# Altium PCB CLP_007.PcbDoc (part 2 of 2)
Units mm, origin at the board's own origin, x right, y up, seen from the top; angles counter-clockwise.
Board outline 145 x 100 mm, 2 copper layers (Top Layer, Bottom Layer); 159 components, 145 nets, 656 pads, 92 vias.
Unrouted connection lines stored in the file: 86.
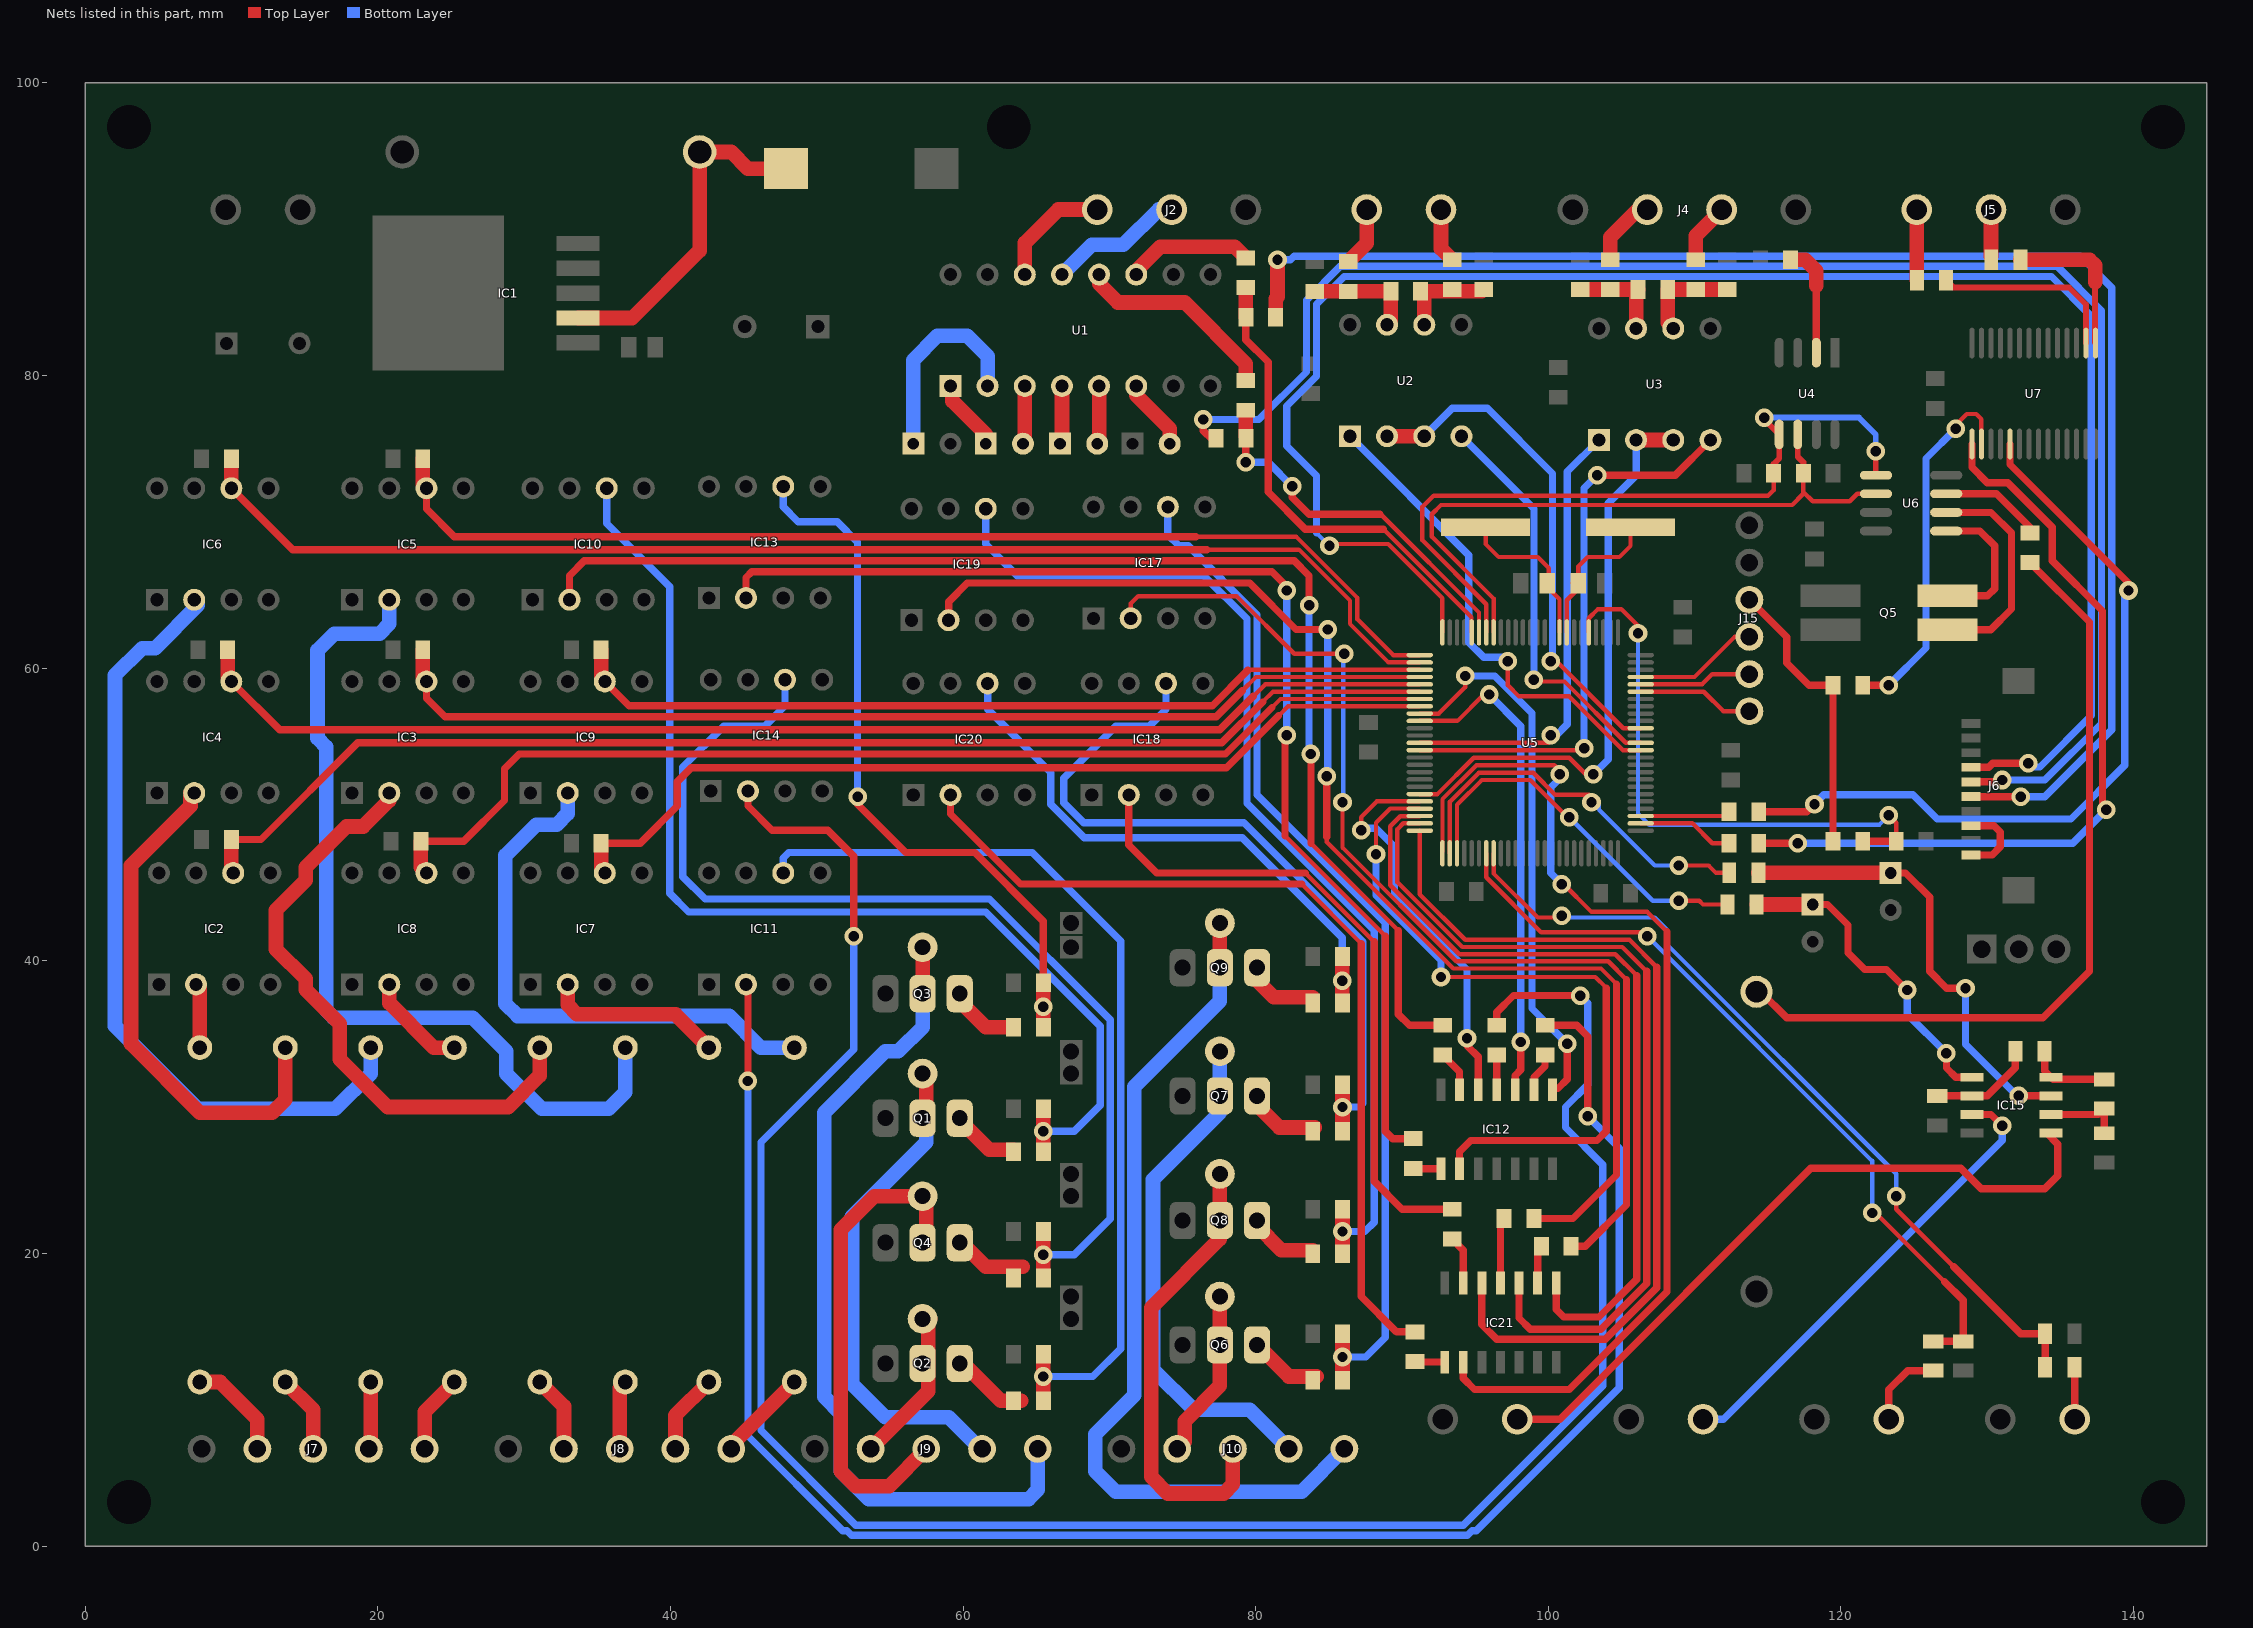
[diagram p2: the nets of this part, all layers, seen from the top]

## Via types
v1: diameter 1.27, hole 0.711, Top Layer to Bottom Layer, 92 vias

## Nets (pads, with @x,y where several pads share a name; then routed paths per layer and width w, separated by ;. In a path a pad name is that pad's centre, name@x,y a point inside that pad or via, vN(x,y) a via of type N, cw(c..) or ccw(c..) an arc to the next point about the centre after c; other vN are vias at no path point) (continued)
NetBATH1_1: BATH1.1 R53.1 | length 54.4
  Top Layer w0.5: BATH1.1@114.222,37.885 114.501,37.885 116.285,36.101 133.811,36.101 136.986,39.276 136.986,63.152 R53.1@132.922,67.216
NetC5_1: C5.1 U1.2 | length 14.1
  Bottom Layer w1: C5.1@56.595,75.344 56.595,81.059 58.246,82.71 60.278,82.71 61.675,81.313 U1.2@61.675,79.281
NetC6_1: C6.1 U1.1 | length 4.9
  Top Layer w1: U1.1@59.135,79.281 59.262,79.154 59.262,78.265 61.548,75.979 C6.1@61.548,75.344
NetC6_2: C6.2 U1.3 | length 3.8
  Top Layer w1: C6.2@64.215,75.471 U1.3@64.215,79.281
NetC7_1: C7.1 U1.4 | length 3.8
  Top Layer w1: C7.1@66.755,75.471 U1.4@66.755,79.281
NetC7_2: C7.2 U1.5 | length 3.8
  Top Layer w1: C7.2@69.295,75.471 U1.5@69.295,79.281
NetC8_2: C8.2 U1.6 | length 4.9
  Top Layer w1: U1.6@71.835,79.281 71.835,78.646 74.121,76.36 C8.2@74.121,75.344
NetC15_2: C15.2 U5.34 X1.1 | length 10.8
  Top Layer w0.3: X1.1@95.711,69.629 95.711,68.486 96.6,67.597 99.267,67.597 100.04,66.824 100.04,65.427 100.759,64.708 U5.34@100.759,62.447
NetC16_2: C16.2 U5.33 X1.2 | length 10.3
  Top Layer w0.3: U5.33@101.259,62.447 101.259,64.636 101.934,65.311 101.934,65.554 C16.2@101.669,65.819 ; C16.2@102.05,65.819 102.05,66.951 102.696,67.597 104.855,67.597 105.617,68.359 X1.2@105.617,69.629
NetC19_1: C19.1 U7.2 | length 25.4
  Top Layer w0.3: v1(127.842,76.36) 127.842,76.614 128.604,77.376 129.239,77.376 129.601,77.014 U7.2@129.601,75.323
  Top Layer w0.5: C19.1@121.492,58.834 v1(123.27,58.834)
  Bottom Layer w0.5: v1(123.27,58.834) 125.81,61.374 125.81,74.328 v1(127.842,76.36)
NetC19_2: C19.2 J15.3 R39.1 | length 19.8
  Top Layer w0.5: J15.3@113.745,64.676 116.285,62.136 116.285,60.358 117.809,58.834 C19.2@119.46,58.834 R39.1@119.46,48.166
NetC20_1: C20.1 IC15.3 R58.2 | length 31.5
  Top Layer w0.5: C20.1@123.397,46.007 124.413,46.007 126.064,44.356 126.064,39.276 127.207,38.133 v1(128.51,38.133) ; v1(132.16,30.767) IC15.3@134.352,30.767
  Top Layer w1: R58.2@114.364,46.007 C20.1@123.397,46.007
  Bottom Layer w0.5: v1(128.51,38.133) 128.51,34.29 v1@132.096,30.703
NetC21_1: C21.1 IC15.5 R61.2 | length 22.3
  Top Layer w0.5: C21.1@118.063,43.848 119.079,43.848 120.476,42.451 120.476,40.546 121.619,39.403 123.11,39.403 124.507,38.006 v1(124.54,38.006) ; v1(127.207,33.688) 127.207,32.672 127.842,32.037 IC15.5@128.952,32.037
  Top Layer w1: R61.2@114.237,43.848 C21.1@118.063,43.848
  Bottom Layer w0.5: v1(124.54,38.006) 124.54,36.355 v1(127.207,33.688)
NetD1_1: D1.1 IC1.2 L1.1 | length 23.3
  Top Layer w1: IC1.2@33.685,83.931 37.369,83.931 41.99,88.552 D1.1@41.99,95.283 44.149,95.283 45.292,94.14 L1.1@47.889,94.14
NetD2_2: D2.2 J9.4 Q1.2 | length 34.2
  Top Layer w1: Q1.2@57.484,28.862 D2.2@57.484,32.291
  Bottom Layer w1: Q1.2@57.484,28.862 57.484,27.592 52.404,22.512 52.404,11.082 54.69,8.796 59.008,8.796 61.294,6.51 J9.4@61.294,6.637
NetD3_2: D3.2 J9.2 Q2.2 | length 10.6
  Top Layer w1: J9.2@53.674,6.637 57.611,10.574 57.611,12.352 57.611,15.4 D3.2@57.738,15.527
NetD4_2: D4.2 J9.5 Q3.2 | length 56.5
  Top Layer w1: Q3.2@57.23,37.244 D4.2@57.23,40.546
  Bottom Layer w1: Q3.2@57.23,37.244 57.23,35.466 55.579,33.815 54.69,33.815 50.499,29.624 50.499,10.193 51.642,9.05 51.642,5.113 53.547,3.208 64.469,3.208 65.104,3.843 J9.5@65.104,6.637
NetD5_2: D5.2 J9.3 Q4.2 | length 33.9
  Top Layer w1: J9.3@57.484,6.637 54.944,4.097 52.658,4.097 51.642,5.113 51.642,21.623 53.928,23.909 57.484,23.909 Q4.2@57.484,20.607
NetD6_2: D6.2 J10.2 Q6.2 | length 11.8
  Top Layer w1: J10.2@74.629,6.637 75.137,7.145 75.137,8.542 77.55,10.955 Q6.2@77.55,13.876 ; Q6.2@77.55,13.749 D6.2@77.55,17.051
NetD7_2: D7.2 J10.4 Q7.2 | length 35.4
  Bottom Layer w1: D7.2@78.058,33.815 77.55,33.307 Q7.2@77.55,30.767 77.55,29.624 72.978,25.052 72.978,12.098 75.772,9.304 79.582,9.304 J10.4@82.249,6.637
NetD8_2: D8.2 J10.3 Q8.2 | length 29.5
  Top Layer w1: Q8.2@77.55,20.988 72.851,16.289 72.851,9.939 72.851,4.732 73.994,3.589 77.804,3.589 78.439,4.224 J10.3@78.439,6.637 ; Q8.2@77.55,22.258 D8.2@77.55,24.798
NetD9_2: D9.2 J10.5 Q9.2 | length 58.8
  Top Layer w1: Q9.2@77.55,39.53 D9.2@77.55,41.562
  Bottom Layer w1: Q9.2@77.55,39.53 77.55,37.244 71.708,31.402 71.708,10.32 69.041,7.653 69.041,5.113 70.438,3.716 83.138,3.716 J10.5@86.059,6.637
NetIC2_2: IC2.2 R23.2 | length 4.2
  Top Layer w1: R23.2@7.827,34.069 IC2.2@7.827,38.26
NetIC2_6: IC2.6 R21.2 U5.56 | length 87.8
  Top Layer w0.3: 80.471,57.691 81.177,58.397 U5.56@91.209,58.397
  Top Layer w0.5: R21.2@9.986,48.293 12.018,48.293 18.622,54.897 77.677,54.897 80.471,57.691
  Top Layer w1: R21.2@9.986,48.293 9.986,46.261 IC2.6@10.24,46.007
NetIC3_2: IC3.2 R24.2 | length 41.7
  Top Layer w1: IC3.2@20.781,51.468 20.781,50.96 19.003,49.182 17.86,49.182 15.066,46.388 15.066,45.499 13.034,43.467 13.034,40.8 15.066,38.768 15.066,38.02 17.399,35.687 17.399,33.274 20.668,30.005 28.909,30.005 31.068,32.164 R24.2@31.068,34.069
NetIC3_6: IC3.6 R22.2 U5.54 | length 72.6
  Top Layer w0.3: 79.074,58.453 80.018,59.397 U5.54@91.209,59.397
  Top Layer w0.5: IC3.6@23.321,59.088 23.321,57.945 24.591,56.675 77.296,56.675 79.074,58.453
  Top Layer w1: IC3.6@23.067,59.342 R22.2@23.067,61.247
NetIC4_2: IC4.2 R27.2 | length 35.2
  Top Layer w1: IC4.2@7.192,51.468 7.192,50.579 3.128,46.515 3.128,34.323 7.827,29.624 12.78,29.624 13.669,30.513 R27.2@13.669,34.069
NetIC4_6: IC4.6 R25.2 U5.55 | length 86.1
  Top Layer w0.3: 79.836,58.072 80.661,58.897 U5.55@91.209,58.897
  Top Layer w0.5: IC4.6@9.986,59.088 13.288,55.786 77.55,55.786 79.836,58.072
  Top Layer w1: R25.2@9.732,61.247 9.732,59.342 IC4.6@9.986,59.088
NetIC5_2: IC5.2 R28.2 | length 59.8
  Bottom Layer w1: IC5.2@20.781,64.676 20.781,63.025 20.113,62.357 17.018,62.357 15.875,61.214 15.875,55.199 16.463,54.611 16.463,36.609 16.971,36.101 26.496,36.101 28.782,33.815 28.782,32.291 31.195,29.878 35.767,29.878 36.91,31.021 R28.2@36.91,34.069
NetIC5_6: IC5.6 R26.2 U5.51 | length 76.4
  Top Layer w0.3: 75.899,68.994 82.757,68.994 86.948,64.803 86.948,63.341 89.392,60.897 U5.51@91.209,60.897
  Top Layer w0.5: IC5.6@23.321,72.296 23.321,70.899 25.226,68.994 75.899,68.994
  Top Layer w1: R26.2@23.067,74.328 23.067,72.55 IC5.6@23.321,72.296
NetIC6_2: IC6.2 R31.2 | length 54.6
  Bottom Layer w1: IC6.2@7.7,64.676 7.7,64.295 4.779,61.374 3.89,61.374 2.032,59.516 2.032,35.546 7.7,29.878 17.098,29.878 19.511,32.291 R31.2@19.511,34.069
NetIC6_6: IC6.6 R29.2 U5.52 | length 88.9
  Top Layer w0.3: 76.661,68.105 82.953,68.105 86.44,64.618 86.44,63.025 89.068,60.397 U5.52@91.209,60.397
  Top Layer w0.5: IC6.6@9.986,72.296 14.177,68.105 76.661,68.105
  Top Layer w1: IC6.6@9.986,72.55 R29.2@9.986,74.328
NetIC7_2: IC7.2 R32.2 | length 12.3
  Top Layer w1: IC7.2@32.973,38.387 32.973,36.99 33.608,36.355 40.339,36.355 R32.2@42.625,34.069
NetIC7_6: IC7.6 R30.2 U5.58 | length 62.9
  Top Layer w0.3: 81.55,56.738 82.209,57.397 U5.58@91.209,57.397
  Top Layer w0.5: R30.2@35.259,48.039 37.926,48.039 40.466,50.579 40.466,52.23 41.427,53.191 78.003,53.191 81.55,56.738
  Top Layer w1: R30.2@35.259,48.039 35.259,46.261 IC7.6@35.513,46.007
NetIC8_2: IC8.2 R35.2 | length 7
  Top Layer w1: IC8.2@20.781,38.387 20.781,37.117 23.829,34.069 R35.2@25.226,34.069
NetIC8_6: IC8.6 R33.2 U5.57 | length 75.9
  Top Layer w0.3: 81.106,57.31 81.693,57.897 U5.57@91.209,57.897
  Top Layer w0.5: R33.2@22.94,48.166 25.861,48.166 28.655,50.96 28.655,53.119 29.671,54.135 77.931,54.135 81.106,57.31
  Top Layer w1: R33.2@22.94,48.166 22.94,46.388 IC8.6@23.321,46.007
NetIC9_2: IC9.2 R36.2 | length 38
  Bottom Layer w1: IC9.2@32.973,51.468 32.973,50.071 32.211,49.309 30.814,49.309 28.702,47.197 28.702,37.07 29.544,36.228 44.022,36.228 46.181,34.069 R36.2@48.467,34.069
NetIC9_6: IC9.6 R34.2 U5.53 | length 59.7
  Top Layer w0.3: 79.455,59.85 79.502,59.897 U5.53@91.209,59.897
  Top Layer w0.5: IC9.6@35.513,59.088 37.164,57.437 77.042,57.437 79.455,59.85
  Top Layer w1: R34.2@35.259,61.247 35.259,59.342 IC9.6@35.513,59.088
NetIC10_2: IC10.2 R43.2 | length 89
  Top Layer w0.3: 83.773,48.039 89.742,42.07
  Top Layer w0.5: IC10.2@33.1,64.676 33.1,66.327 34.116,67.343 82.63,67.343 83.646,66.327 v1@83.646,64.168 ; 83.773,48.039 v1(83.773,54.135) ; 89.742,42.07 89.742,36.355 90.504,35.593 R43.2@92.79,35.593
  Bottom Layer w0.5: v1@83.646,54.135 v1(83.646,64.295)
NetIC10_6: IC10.6 R41.2 R45.1 | length 74.9
  Top Layer w1: R45.1@65.485,27.211 v1(65.485,28.354) R41.2@65.485,29.497
  Bottom Layer w0.5: IC10.6@35.64,72.296 35.64,69.883 39.958,65.565 39.958,44.61 41.228,43.34 61.548,43.34 69.367,35.521 69.367,30.132 67.589,28.354 v1(65.485,28.354)
NetIC11_2: IC11.2 R44.2 | length 125.3
  Top Layer w0.5: IC11.2@45.165,38.387 45.292,38.26 v1(45.292,31.783) ; R44.2@100.029,35.593 101.934,35.593 102.696,34.831 v1(102.696,29.37)
  Bottom Layer w0.5: v1(45.292,31.783) 45.292,7.526 51.769,1.049 52.063,1.049 52.372,0.74 94.473,0.74 94.782,1.049 95.076,1.049 104.855,10.828 104.855,27.211 v1(102.696,29.37)
NetIC11_6: IC11.6 R42.2 R46.1 | length 63.3
  Top Layer w1: R46.1@65.485,10.193 v1(65.485,11.59) R42.2@65.485,12.86
  Bottom Layer w0.5: IC11.6@47.705,46.007 47.705,47.023 48.086,47.404 64.723,47.404 70.768,41.359 70.768,13.495 68.863,11.59 v1(65.485,11.59)
NetIC12_1: IC12.1 U5.59 | length 37.6
  Top Layer w0.3: U5.59@91.209,56.897 92.504,56.897 94.314,58.707 v1(94.314,59.469)
  Top Layer w0.5: IC12.1@100.283,31.181 100.377,31.275 100.664,31.275 101.299,31.91 v1(101.299,34.323)
  Bottom Layer w0.5: v1(94.314,59.469) 96.346,59.469 98.886,56.929 98.886,36.736 v1(101.299,34.323)
NetIC12_2: IC12.2 R44.1 | length 2.7
  Top Layer w0.5: IC12.2@99.013,31.181 99.013,32.037 99.775,32.799 R44.1@99.775,33.561
NetIC12_3: IC12.3 U5.60 | length 33.6
  Top Layer w0.3: U5.60@91.209,56.397 93.782,56.397 95.584,58.199 v1(95.965,58.199)
  Top Layer w0.5: IC12.3@97.743,31.181 97.743,32.164 98.124,32.545 v1(98.124,34.45)
  Bottom Layer w0.5: v1(95.965,58.199) 98.124,56.04 v1(98.124,34.45)
NetIC12_4: IC12.4 R50.1 | length 2.5
  Top Layer w0.5: R50.1@96.219,33.561 96.473,33.307 IC12.4@96.473,31.181
NetIC12_5: IC12.5 U5.71 | length 27.4
  Top Layer w0.3: v1(87.202,48.928) 87.202,49.817 88.282,50.897 U5.71@91.209,50.897
  Top Layer w0.5: v1(94.441,34.704) 94.441,34.196 95.203,33.434 IC12.5@95.203,31.181
  Bottom Layer w0.5: v1(87.202,48.928) 87.075,49.055 88.218,49.055 89.488,47.785 89.488,44.356 94.441,39.403 v1(94.441,34.704)
NetIC12_6: IC12.6 R43.1 | length 2.9
  Top Layer w0.5: R43.1@92.79,33.561 93.933,32.418 IC12.6@93.933,31.181
NetIC12_8: IC12.8 R49.1 | length 1.9
  Top Layer w0.5: R49.1@90.758,25.814 90.791,25.781 IC12.8@92.663,25.781
NetIC12_9: IC12.9 U5.72 | length 49
  Top Layer w0.3: v1(88.218,47.277) 88.218,49.436 89.189,50.407 U5.72@91.199,50.407 ; v1(92.663,38.895) 103.204,38.895 103.966,38.133
  Top Layer w0.5: IC12.9@93.933,25.781 93.933,26.957 94.695,27.719 103.331,27.719 103.966,28.354 103.966,38.133
  Bottom Layer w0.5: v1(88.218,47.277) 88.218,44.483 92.663,40.038 v1(92.663,38.895)
NetIC13_2: IC13.2 R49.2 | length 81.1
  Top Layer w0.3: 81.995,48.547 88.853,41.689
  Top Layer w0.5: IC13.2@45.165,64.803 45.165,66.2 45.546,66.581 81.106,66.581 81.995,65.692 81.995,65.438 v1(82.122,65.311) ; 81.995,48.547 v1@81.995,55.405 ; 88.853,41.689 88.853,28.354 89.361,27.846 R49.2@90.758,27.846
  Bottom Layer w0.5: v1(82.122,55.405) v1(82.122,65.311)
NetIC13_6: IC13.6 R47.2 R51.1 | length 48
  Top Layer w0.5: v1(52.785,51.214) 52.785,50.706 56.087,47.404 60.786,47.404 65.485,42.705 R47.2@65.485,38.514
  Top Layer w1: R51.1@65.485,35.466 v1(65.485,36.863) R47.2@65.485,37.879
  Bottom Layer w0.5: IC13.6@47.705,72.423 47.705,71.026 48.721,70.01 51.388,70.01 52.785,68.613 v1(52.785,51.214)
NetIC14_2: IC14.2 R50.2 | length 151.9
  Top Layer w0.5: IC14.2@45.292,51.595 45.292,50.579 46.943,48.928 50.753,48.928 52.531,47.15 v1(52.531,41.689) ; R50.2@96.473,35.593 96.473,36.482 97.616,37.625 v1(102.188,37.625)
  Bottom Layer w0.5: IC14.2@45.292,51.087 IC14.2@45.292,51.595 ; v1(52.531,41.689) 52.531,33.942 46.181,27.592 46.181,7.907 52.658,1.43 94.187,1.43 103.712,10.955 103.712,26.068 101.172,28.608 101.172,30.005 102.696,31.529 102.696,37.117 v1(102.188,37.625)
NetIC14_6: IC14.6 R48.2 R52.1 | length 73.6
  Top Layer w1: R52.1@65.485,18.321 v1(65.485,19.908) R48.2@65.485,21.496
  Bottom Layer w0.5: IC14.6@47.832,59.215 47.832,57.437 46.435,56.04 43.641,56.04 40.847,53.246 40.847,45.753 42.371,44.229 61.802,44.229 70.057,35.974 70.057,22.364 67.602,19.908 v1(65.485,19.908)
NetIC15_1: IC15.1 J11.2 | length 48.2
  Top Layer w0.5: J11.2@97.87,8.669 100.791,8.669 117.936,25.814 128.191,25.814 129.588,24.417 133.938,24.417 134.827,25.306 134.827,27.465 IC15.1@134.065,28.227
NetIC15_2: IC15.2 R59.1 R60.2 | length 5.5
  Top Layer w0.5: IC15.2@134.352,29.497 137.605,29.497 R59.1@138.002,29.894 R60.2@138.002,28.211
NetIC15_4: IC15.4 R59.2 R64.2 | length 5.7
  Top Layer w0.5: R64.2@133.922,33.815 133.922,32.467 IC15.4@134.352,32.037 134.495,31.894 R59.2@138.002,31.894
NetIC15_6: IC15.6 R64.1 R65.2 | length 7.3
  Top Layer w0.5: R65.2@126.572,30.751 126.588,30.767 IC15.6@128.952,30.767 130.001,30.767 131.922,32.688 R64.1@131.922,33.815
NetIC15_7: IC15.7 J12.2 | length 31.7
  Top Layer w0.5: IC15.7@128.952,29.497 130.255,29.497 v1(131.017,28.735)
  Bottom Layer w0.5: J12.2@110.57,8.669 111.967,8.669 131.017,27.719 v1(131.017,28.735)
NetIC17_2: IC17.2 R70.2 | length 74.3
  Top Layer w0.3: IC17.2@71.454,63.406 71.454,64.422 71.962,64.93 78.693,64.93 82.63,60.993 v1(86.059,60.993) ; v1(85.932,50.833) 85.932,47.738 93.705,39.965 104.086,39.965 105.346,38.705
  Top Layer w0.5: R70.2@101.553,20.48 102.514,20.48 105.346,23.312 105.346,38.705
  Bottom Layer w0.3: v1(85.932,50.833) 85.991,50.892 85.991,60.925 v1(86.059,60.993)
NetIC17_6: IC17.6 R68.2 R72.1 | length 69.4
  Top Layer w1: R72.1@85.932,11.59 v1(85.932,12.923) R68.2@85.932,14.257
  Bottom Layer w0.5: IC17.6@73.994,71.026 73.994,69.121 74.756,68.359 75.391,68.359 80.09,63.66 80.09,51.341 88.853,42.578 88.853,14.257 87.519,12.923 v1(85.932,12.923)
NetIC18_2: IC18.2 R71.2 | length 45.4
  Top Layer w0.3: 83.392,46.007 88.091,41.308
  Top Layer w0.5: IC18.2@71.327,51.341 71.327,47.912 73.232,46.007 83.392,46.007 ; 88.091,41.308 88.091,24.925 89.996,23.02 R71.2@93.425,23.02
NetIC18_6: IC18.6 R69.2 R73.1 | length 51.6
  Top Layer w1: R73.1@85.932,28.608 v1(85.932,30.005) R69.2@85.932,30.894
  Bottom Layer w0.5: IC18.6@73.867,58.961 73.867,57.183 72.724,56.04 70.438,56.04 66.882,52.484 66.882,50.793 68.239,49.436 79.201,49.436 87.329,41.308 87.329,30.259 87.075,30.005 v1(85.932,30.005)
NetIC19_2: IC19.2 R76.2 | length 87.3
  Top Layer w0.3: 84.857,48.479 84.857,48.12 93.502,39.475 103.6,39.475 104.656,38.419
  Top Layer w0.5: IC19.2@59.008,63.279 59.008,64.549 60.278,65.819 79.582,65.819 82.757,62.644 v1(84.916,62.644) ; 84.857,48.479 v1(84.857,52.611) ; R76.2@99.013,22.385 101.68,22.385 104.656,25.361 104.656,38.419
  Bottom Layer w0.5: v1(84.857,52.611) 84.916,52.67 v1(84.916,62.644)
NetIC19_6: IC19.6 R74.2 R78.1 | length 72.2
  Top Layer w1: R78.1@85.932,20.226 v1(85.932,21.496) R74.2@85.932,22.766
  Bottom Layer w0.5: IC19.6@61.548,70.899 61.548,68.486 63.707,66.327 76.447,66.327 79.4,63.374 79.4,50.761 88.091,42.07 88.091,22.131 87.456,21.496 v1(85.932,21.496)
NetIC20_2: IC20.2 R77.2 | length 61.9
  Top Layer w0.3: 83.138,45.245 87.202,41.181
  Top Layer w0.5: IC20.2@59.135,51.341 59.135,50.031 63.921,45.245 83.138,45.245 ; 87.202,41.181 87.202,17.051 89.615,14.638 R77.2@90.885,14.638
NetIC20_6: IC20.6 R75.2 R79.1 | length 39.2
  Top Layer w1: R79.1@85.923,37.498 v1(85.923,38.641) R75.2@85.923,40.038
  Bottom Layer w0.5: IC20.6@61.675,58.961 61.675,57.183 65.993,52.865 65.993,50.706 68.279,48.42 79.074,48.42 85.923,41.571 v1(85.923,38.641)
NetIC21_1: IC21.1 U5.73 | length 55.1
  Top Layer w0.3: U5.73@91.209,49.897 91.199,49.887 89.881,49.887 89.193,49.199 89.193,45.17 93.908,40.455 104.571,40.455 106.036,38.99
  Top Layer w0.5: IC21.1@100.537,17.973 100.537,16.162 101.045,15.654 103.458,15.654 106.036,18.232 106.036,38.99
NetIC21_2: IC21.2 R70.1 | length 2.5
  Top Layer w0.5: IC21.2@99.267,17.973 99.267,19.972 R70.1@99.648,20.353
NetIC21_3: IC21.3 U5.74 | length 58.9
  Top Layer w0.3: U5.74@91.209,49.397 90.084,49.397 89.683,48.996 89.683,45.373 94.111,40.945 105.057,40.945 106.726,39.276
  Top Layer w0.5: IC21.3@97.997,17.973 97.997,15.582 98.759,14.82 103.6,14.82 106.726,17.946 106.726,39.276
NetIC21_4: IC21.4 R76.1 | length 4.4
  Top Layer w0.5: IC21.4@96.727,17.973 R76.1@96.727,22.385
NetIC21_5: IC21.5 U5.75 | length 61.2
  Top Layer w0.3: U5.75@91.209,48.897 91.199,48.907 91.199,44.55 94.314,41.435 105.543,41.435 107.416,39.562
  Top Layer w0.5: IC21.5@95.457,17.973 95.457,15.146 96.473,14.13 103.886,14.13 107.416,17.66 107.416,39.562
NetIC21_6: IC21.6 R71.1 | length 3.3
  Top Layer w0.5: R71.1@93.425,20.988 94.187,20.226 IC21.6@94.187,17.973
NetIC21_8: IC21.8 R77.1 | length 2
  Top Layer w0.5: R77.1@90.918,12.573 IC21.8@92.917,12.573
NetIC21_9: IC21.9 U5.76 | length 72.9
  Top Layer w0.3: U5.76@92.769,47.447 92.769,51.055 95.087,53.373 100.41,53.373 v1@101.108,52.674 ; v1@100.981,45.308 102.95,43.34 106.76,43.34 108.106,41.994
  Top Layer w0.5: IC21.9@94.187,12.573 94.187,11.463 94.949,10.701 101.432,10.701 108.106,17.375 108.106,41.994
  Bottom Layer w0.5: v1(100.791,52.738) 101.045,52.738 100.156,51.849 100.156,46.007 v1(100.918,45.245)
NetJ2_2: J2.2 U1.13 | length 9.3
  Bottom Layer w1: U1.13@66.755,86.901 68.787,88.933 70.946,88.933 73.359,91.346 J2.2@74.248,91.346
NetJ2_3: J2.3 U1.14 | length 8.1
  Top Layer w1: U1.14@64.215,86.901 64.215,89.06 66.501,91.346 J2.3@69.168,91.346
NetJ3_1: J3.1 R2.2 | length 3.7
  Top Layer w1: J3.1@92.663,91.346 92.663,88.679 R2.2@93.425,87.917
NetJ3_2: J3.2 R4.2 | length 4.1
  Top Layer w1: R4.2@86.313,87.79 87.583,89.06 J3.2@87.583,91.346
NetJ4_2: J4.2 R9.2 | length 4.2
  Top Layer w1: R9.2@110.062,87.917 110.062,89.568 J4.2@111.84,91.346
NetJ4_3: J4.3 R12.2 | length 4.9
  Top Layer w1: R12.2@104.22,87.917 104.22,89.441 106.125,91.346 J4.3@106.76,91.346
NetJ5_2: J5.2 R57.1 | length 3.2
  Top Layer w1: R57.1@130.255,88.155 J5.2@130.255,91.346
NetJ5_3: J5.3 R55.1 | length 4.8
  Top Layer w1: R55.1@125.175,86.52 J5.3@125.175,91.346
NetJ6_1: J6.1 J6.3 | length 5.4
  Top Layer w0.5: J6.1@128.884,47.226 130.331,47.226 130.89,47.785 130.89,48.801 130.465,49.226 J6.3@128.884,49.226
NetJ6_5: J6.5 R8.2 | length 103.7
  Top Layer w0.5: J6.5@128.884,51.226 128.896,51.214 v1(132.287,51.214)
  Top Layer w1: R8.2@81.36,83.98 81.36,85.25 81.487,85.377 v1(81.487,87.917)
  Bottom Layer w0.5: v1(81.487,87.917) 82.376,87.917 82.613,88.154 136.368,88.154 138.51,86.012 138.51,55.786 133.938,51.214 v1(132.287,51.214)
NetJ6_6: J6.6 R13.2 | length 110.3
  Top Layer w0.5: v1(76.407,76.995) 76.407,76.233 R13.2@77.042,75.598 ; J6.6@128.884,52.226 128.888,52.23 130.509,52.23 130.636,52.357 v1(131.017,52.357)
  Bottom Layer w0.5: v1(76.407,76.995) 80.217,76.995 83.464,80.242 83.464,85.155 85.773,87.464 134.772,87.464 137.803,84.433 137.803,56.222 133.938,52.357 v1(131.017,52.357)
NetJ6_7: J6.7 U5.50 | length 122.5
  Top Layer w0.3: v1(85.043,68.359) 85.043,68.486 89.049,68.486 92.759,64.776 U5.50@92.759,62.447
  Top Layer w0.5: J6.7@128.884,53.226 130.108,53.226 130.382,53.5 v1(132.795,53.5)
  Bottom Layer w0.3: 84.154,69.248 v1(85.043,68.359)
  Bottom Layer w0.5: 84.154,69.248 84.154,73.153 82.122,75.185 82.122,77.924 84.154,79.956 84.154,84.869 86.059,86.774 134.391,86.774 137.113,84.052 137.113,56.762 133.597,53.246 132.795,53.246 v1(132.795,53.5)
NetJ7_2: J7.2 R23.1 | length 7
  Top Layer w1: R23.1@7.827,11.209 9.224,11.209 11.764,8.669 J7.2@11.764,6.637
NetJ7_3: J7.3 R27.1 | length 5.4
  Top Layer w1: R27.1@13.669,11.209 15.574,9.304 J7.3@15.574,6.637
NetJ7_4: J7.4 R31.1 | length 4.6
  Top Layer w1: J7.4@19.384,6.637 19.511,6.764 R31.1@19.511,11.209
NetJ7_5: J7.5 R35.1 | length 5.4
  Top Layer w1: J7.5@23.194,6.637 23.194,9.177 R35.1@25.226,11.209
NetJ8_2: J8.2 R24.1 | length 5.3
  Top Layer w1: R24.1@31.068,11.209 32.719,9.558 J8.2@32.719,6.637
NetJ8_3: J8.3 R28.1 | length 4.7
  Top Layer w1: J8.3@36.529,6.637 36.529,10.828 R28.1@36.91,11.209
NetJ8_4: J8.4 R32.1 | length 5.5
  Top Layer w1: J8.4@40.339,6.637 40.339,8.923 R32.1@42.625,11.209
NetJ8_5: J8.5 R36.1 | length 6.4
  Top Layer w1: J8.5@44.149,6.637 44.149,6.891 R36.1@48.467,11.209
NetJ13_2: J13.2 R62.2 | length 5.6
  Top Layer w0.5: J13.2@123.27,8.669 123.27,10.701 124.556,11.987 R62.2@126.318,11.987
NetJ14_2: J14.2 R63.2 | length 3.7
  Top Layer w0.5: J14.2@135.97,8.669 R63.2@135.97,12.368
NetJ15_4: J15.4 U5.22 | length 8.6
  Top Layer w0.3: U5.22@106.309,59.397 109.99,59.397 112.729,62.136 J15.4@113.745,62.136
NetJ15_5: J15.5 U5.21 | length 7.7
  Top Layer w0.3: U5.21@106.309,58.897 110.506,58.897 111.205,59.596 J15.5@113.745,59.596
NetJ15_6: J15.6 U5.20 | length 8
  Top Layer w0.3: U5.20@106.309,58.397 110.626,58.397 111.967,57.056 J15.6@113.745,57.056
NetQ1_1: Q1.1 R45.2 | length 4.2
  Top Layer w1: Q1.1@60.024,28.862 61.802,27.084 R45.2@63.453,27.084
NetQ2_1: Q2.1 R46.2 | length 4.8
  Top Layer w1: Q2.1@60.151,12.352 62.564,9.939 63.961,9.939
NetQ3_1: Q3.1 R51.2 | length 4.4
  Top Layer w1: Q3.1@59.77,37.244 61.548,35.466 R51.2@63.453,35.466
NetQ4_1: Q4.1 R52.2 | length 4.5
  Top Layer w1: Q4.1@60.151,20.48 61.548,19.083 64.088,19.083
NetQ5_1: Q5.1 U6.1 | length 10.1
  Top Layer w0.5: U6.1@127.194,69.375 129.493,69.375 130.509,68.359 130.509,65.438 130.018,64.947 Q5.1@127.27,64.947
NetQ5_4: Q5.4 U6.2 | length 15.2
  Top Layer w0.5: U6.2@127.194,70.645 130.255,70.645 131.652,69.248 131.652,64.041 130.238,62.627 Q5.4@127.27,62.627
NetQ6_1: Q6.1 R72.2 | length 5
  Top Layer w1: Q6.1@80.09,13.749 82.249,11.59 R72.2@84.154,11.59
NetQ7_1: Q7.1 R73.2 | length 5.2
  Top Layer w1: Q7.1@80.09,30.767 80.09,30.132 81.614,28.608 R73.2@84.027,28.608
NetQ8_1: Q8.1 R78.2 | length 4.9
  Top Layer w1: Q8.1@80.09,22.258 80.09,21.877 81.741,20.226 R78.2@83.9,20.226
NetQ9_1: Q9.1 R79.2 | length 5.2
  Top Layer w1: Q9.1@80.09,39.53 80.09,38.641 81.233,37.498 R79.2@83.9,37.498
NetR1_2: R1.2 R2.1 R3.1 U2.6 | length 6.2
  Top Layer w1: R3.1@91.266,85.758 R1.2@95.457,85.758 ; U2.6@91.52,83.472 R3.1@91.52,85.504
NetR3_2: R3.2 R4.1 R5.1 U2.7 | length 7.2
  Top Layer w1: R5.1@84.027,85.758 R4.1@86.313,85.758 R3.2@89.234,85.758 U2.7@89.234,83.726
NetR6_1: R6.1 R8.1 U5.46 | length 33.1
  Top Layer w0.3: 88.726,69.502 94.749,63.479 94.749,62.457 U5.46@94.759,62.447
  Top Layer w0.5: R8.1@79.328,83.98 79.328,82.456 80.852,80.932 80.852,72.042 83.392,69.502 88.726,69.502
  Top Layer w1: R8.1@79.328,83.98 R6.1@79.328,86.012
NetR6_2: R6.2 U1.11 | length 8.7
  Top Layer w1: U1.11@71.835,86.901 71.835,87.155 73.486,88.806 78.566,88.806 R6.2@79.328,88.044
NetR7_2: R7.2 R9.1 R11.1 U3.6 | length 6.3
  Top Layer w1: U3.6@108.157,83.599 R11.1@108.157,85.885 R9.1@110.062,85.885 R7.2@112.221,85.885
NetR10_1: R10.1 R13.1 U5.45 | length 25.5
  Top Layer w0.3: 88.472,70.518 88.544,70.518 95.259,63.803 U5.45@95.259,62.447
  Top Layer w0.5: v1(79.328,74.074) R13.1@79.328,75.725 R13.1@79.328,75.852 ; v1(82.503,72.423) 82.503,71.661 83.646,70.518 88.472,70.518
  Top Layer w1: R13.1@79.328,75.852 R10.1@79.328,77.63
  Bottom Layer w0.5: v1(79.328,74.074) 80.852,74.074 v1(82.503,72.423)
NetR10_2: R10.2 U1.12 | length 14.1
  Top Layer w1: U1.12@69.295,86.901 69.295,86.266 70.565,84.996 75.137,84.996 79.328,80.805 R10.2@79.328,79.662
NetR11_2: R11.2 R12.1 R14.1 U3.7 | length 6.7
  Top Layer w1: R14.1@102.188,85.885 R12.1@104.22,85.885 R11.2@106.125,85.885 105.998,85.758 U3.7@105.998,83.218
NetR19_1: R19.1 U4.2 | length 7.7
  Top Layer w0.5: U4.2@118.317,81.567 118.317,86.139
  Top Layer w1: R19.1@116.539,87.917 117.555,87.917 118.317,87.155 118.317,86.139
NetR37_2: R37.2 U4.6 U5.43 U6.6 | length 45.5
  Top Layer w0.3: U5.43@96.259,62.447 96.259,64.763 92.028,68.994 92.028,70.518 92.663,71.153 116.666,71.153 117.428,71.915 117.428,72.042 ; R37.2@117.428,73.312 117.428,72.042 ; U6.6@122.394,71.915 121.111,71.915 120.603,71.407 118.063,71.407 117.428,72.042
  Top Layer w0.4: U4.6@117.047,75.979 117.047,74.455 117.428,74.074 R37.2@117.428,73.312
NetR38_2: R38.2 U4.5 U5.44 U6.5 | length 51.6
  Top Layer w0.3: U5.44@95.759,62.447 95.759,64.374 91.393,68.74 91.393,71.026 92.155,71.788 115.015,71.788 115.396,72.169 R38.2@115.396,73.312
  Top Layer w0.4: v1(114.761,77.122) 114.634,77.249 114.634,77.122 U4.5@115.777,75.979 115.777,74.328 115.396,73.947 R38.2@115.396,73.312 ; v1(122.381,74.836) 122.381,73.198 U6.5@122.394,73.185
  Bottom Layer w0.4: v1(114.761,77.122) 121.238,77.122 122.381,75.979 v1(122.381,74.836)
NetR39_2: R39.2 R40.2 U5.30 | length 40.1
  Top Layer w0.3: U5.30@102.759,62.447 102.759,63.411 103.389,64.041 104.982,64.041 106.379,62.644 v1(106.125,62.39) ; v1(123.27,49.944) 123.778,49.436 R40.2@123.778,48.166
  Top Layer w0.5: R39.2@121.492,48.166 R40.2@123.778,48.166
  Bottom Layer w0.3: v1(106.125,62.39) 106.125,50.071 106.887,49.309 122.635,49.309 v1(123.27,49.944)
NetR53_2: R53.2 U6.3 | length 7.1
  Top Layer w0.5: U6.3@127.194,71.915 130.636,71.915 132.922,69.629 R53.2@132.922,69.248
NetR54_1: R54.1 U7.1 | length 54.5
  Top Layer w0.5: R54.1@114.38,48.039 v1(117.047,48.039) ; U7.1@128.951,75.323 128.951,73.727 130.001,72.677 131.398,72.677 134.446,69.629 134.446,67.343 137.875,63.914 137.875,50.325 v1(138.129,50.325)
  Bottom Layer w0.5: v1(117.047,48.039) 135.843,48.039 v1(138.129,50.325)
NetR54_2: R54.2 U5.2 | length 6.6
  Top Layer w0.3: U5.2@106.309,49.397 109.847,49.397 111.205,48.039 R54.2@112.348,48.039
NetR55_2: R55.2 U7.16 | length 12.9
  Top Layer w0.4: R55.2@127.191,86.52 127.699,86.012 135.589,86.012 136.751,84.85 U7.16@136.751,82.223
NetR56_1: R56.1 U7.5 | length 53.2
  Top Layer w0.5: R56.1@114.38,50.198 117.682,50.198 v1(118.19,50.706) ; U7.5@131.551,75.323 131.551,73.921 139.653,65.819 v1(139.653,65.311)
  Bottom Layer w0.5: v1(118.19,50.706) 118.825,51.341 124.921,51.341 126.572,49.69 135.716,49.69 139.399,53.373 139.399,65.184 139.526,65.311 v1(139.653,65.311)
NetR56_2: R56.2 U5.3 | length 6.2
  Top Layer w0.3: U5.3@106.309,49.897 112.047,49.897 R56.2@112.348,50.198
NetR57_2: R57.2 U7.15 | length 10.5
  Top Layer w0.4: U7.15@137.367,82.257 137.367,86.393
  Top Layer w1: R57.2@132.271,87.917 136.986,87.917 137.367,87.536 137.367,86.393
NetR58_1: R58.1 U5.77 | length 26.4
  Top Layer w0.3: U5.77@93.259,47.347 93.269,47.357 93.269,50.862 95.254,52.847 98.962,52.847 100.468,51.341 v1@102.787,51.341 ; v1(102.95,50.833) v1@103.295,50.833 ; v1(108.919,46.515) 110.951,46.515 111.459,46.007 R58.1@112.364,46.007
  Bottom Layer w0.3: v1(102.95,50.833) 103.295,50.833 103.458,50.67 103.458,50.325 107.268,46.515 v1(108.919,46.515)
NetR61_1: R61.1 U5.78 | length 26.2
  Top Layer w0.3: U5.78@93.759,47.347 93.759,50.659 95.457,52.357 98.759,52.357 v1@101.362,49.753 ; v1(101.426,49.817) v1@101.68,49.817 ; v1(108.919,44.102) 110.316,44.102 110.57,43.848 R61.1@112.237,43.848
  Bottom Layer w0.3: v1(101.426,49.817) 107.141,44.102 v1(108.919,44.102)
NetR62_1: R62.1 R66.2 U5.82 | length 53.1
  Top Layer w0.3: U5.82@95.759,47.347 95.759,45.705 99.521,41.943 106.506,41.943 v1(106.76,41.689) ; v1(122.127,22.766) 122.381,22.766 127.08,18.067
  Top Layer w0.5: R62.1@126.318,13.987 R66.2@128.35,13.987 128.35,16.797 127.08,18.067
  Bottom Layer w0.3: v1(106.76,41.689) 122.127,26.322 v1(122.127,22.766)
NetR63_1: R63.1 R67.2 U5.83 | length 56.5
  Top Layer w0.3: U5.83@96.259,47.347 96.259,45.967 99.267,42.959 v1@100.918,42.959 ; v1(123.778,23.909) 123.778,23.02 127.715,19.083
  Top Layer w0.5: 127.715,19.083 132.287,14.511 R67.2@133.954,14.511 R63.1@133.954,12.225
  Bottom Layer w0.3: v1(100.918,43.086) 101.045,42.959 107.268,42.959 108.106,42.121 108.106,41.121 123.778,25.449 v1(123.778,23.909)
NetU2_1: U2.1 U5.12 | length 33.2
  Top Layer w0.3: v1(97.235,60.485) 97.235,58.834 97.997,58.072 101.426,58.072 105.101,54.397 U5.12@106.309,54.397
  Bottom Layer w0.5: U2.1@86.44,75.852 94.568,67.724 94.568,61.755 95.584,60.739 96.981,60.739 v1(97.235,60.485)
NetU2_2: U2.2 U2.3 U5.15 | length 34.9
  Top Layer w0.3: v1(100.156,60.485) 100.537,60.485 105.125,55.897 U5.15@106.309,55.897
  Top Layer w1: U2.2@88.98,75.852 U2.3@91.52,75.852
  Bottom Layer w0.5: U2.3@91.52,75.852 93.425,77.757 95.838,77.757 100.283,73.312 100.283,60.485 v1(100.156,60.485)
NetU2_4: U2.4 U5.13 | length 28
  Top Layer w0.3: v1@99.14,59.342 v1(99.013,59.215) 99.013,59.088 101.103,59.088 105.294,54.897 U5.13@106.309,54.897
  Bottom Layer w0.5: U2.4@94.06,75.852 99.013,70.899 v1(99.013,59.215)
NetU3_1: U3.1 U5.63 | length 31.7
  Top Layer w0.3: U5.63@91.209,54.897 100.029,54.897 100.537,55.405 v1(100.156,55.405)
  Bottom Layer w0.5: v1(100.156,55.405) 100.537,55.405 101.299,56.167 101.299,73.439 U3.1@103.458,75.598
NetU3_2: U3.2 U3.3 U5.70 | length 40.6
  Top Layer w0.3: U5.70@91.209,51.397 92.418,51.397 94.902,53.881 101.426,53.881 102.823,52.484 103.077,52.484 v1(103.077,52.738)
  Top Layer w1: U3.2@105.998,75.598 U3.3@108.538,75.598
  Bottom Layer w0.5: v1@103.077,52.484 v1(103.077,52.738) 104.093,53.754 104.093,71.28 105.998,73.185 U3.2@105.998,75.598
NetU3_4: U3.4 U5.64 | length 39.1
  Top Layer w0.3: U5.64@91.209,54.397 102.323,54.397 v1(102.442,54.516)
  Top Layer w0.5: v1(103.331,73.185) 108.665,73.185 U3.4@111.078,75.598
  Bottom Layer w0.5: v1(102.442,54.516) 102.442,72.296 v1(103.331,73.185)
VCC: 
pads on no net: IC1.6 IC2.1 IC2.4 IC3.1 IC3.4 IC4.1 IC4.4 IC5.1 IC5.4 IC6.1 IC6.4 IC7.1 IC7.4 IC8.1 IC8.4 IC9.1 IC9.4 IC10.1 IC10.4 IC11.1 IC11.4 IC12.10 IC12.11 IC12.12 IC12.13 IC13.1 IC13.4 IC14.1 IC14.4 IC17.1 IC17.4 IC18.1 IC18.4 IC19.1 IC19.4 IC20.1 IC20.4 IC21.10 IC21.11 IC21.12 IC21.13 J6.4 J6.8 Q5.2 Q5.3 U1.7 U1.8 U1.9 U1.10 U5.1 U5.4 U5.5 U5.6 U5.7 U5.8 U5.9 U5.14 U5.16 U5.17 U5.18 U5.19 U5.23 U5.24 U5.25 U5.26 U5.27 U5.28 U5.29 U5.35 U5.36 U5.37 U5.38 U5.39 U5.40 U5.41 U5.42 U5.47 U5.48 U5.49 U5.65 U5.66 U5.67 U5.68 U5.69 U5.79 U5.84 U5.85 U5.86 U5.87 U5.88 U5.89 U5.90 U5.91 U5.92 U5.93 U5.94 U5.95 U5.96 U5.97 U5.98 U6.7 U7.3 U7.6 U7.8 U7.9 U7.10 U7.11 U7.12 U7.13 U7.14 U7.17 U7.19 U7.22 U7.23 U7.24 U7.27 U7.28
copper on no net: | length 490
  Top Layer w0.254: 0,0 0,100 145,100 145,0 0,0

## Text inside footprints (layer, text, board x,y; h text height)
J1: Top Overlay "2" at 10.045,93.746 h1 r180; Top Overlay "1" at 15.045,93.746 h1 r180
J2: Top Overlay "1" at 79.608,93.746 h1 r180; Top Overlay "2" at 74.608,93.746 h1 r180; Top Overlay "3" at 69.608,93.746 h1 r180
J3: Top Overlay "2" at 88.023,93.746 h1 r180; Top Overlay "1" at 93.023,93.746 h1 r180
J4: Top Overlay "3" at 107.2,93.746 h1 r180; Top Overlay "2" at 112.2,93.746 h1 r180; Top Overlay "1" at 117.2,93.746 h1 r180; Top Overlay "4" at 102,93.746 h1 r180
J5: Top Overlay "1" at 135.615,93.746 h1 r180; Top Overlay "2" at 130.615,93.746 h1 r180; Top Overlay "3" at 125.615,93.746 h1 r180
J6: Top Overlay "1" at 127.784,46.976 h1.5 r90; Top Overlay "10" at 127.784,55.126 h1.5 r90
J7: Top Overlay "1" at 7.938,4.287 h1; Top Overlay "2" at 11.448,4.287 h1; Top Overlay "3" at 15.258,4.287 h1; Top Overlay "4" at 19.068,4.287 h1; Top Overlay "5" at 22.878,4.287 h1
J8: Top Overlay "1" at 28.893,4.287 h1; Top Overlay "2" at 32.403,4.287 h1; Top Overlay "3" at 36.213,4.287 h1; Top Overlay "4" at 40.023,4.287 h1; Top Overlay "5" at 43.833,4.287 h1
J9: Top Overlay "1" at 49.848,4.287 h1; Top Overlay "2" at 53.358,4.287 h1; Top Overlay "3" at 57.168,4.287 h1; Top Overlay "4" at 60.978,4.287 h1; Top Overlay "5" at 64.788,4.287 h1
J10: Top Overlay "1" at 70.803,4.287 h1; Top Overlay "2" at 74.313,4.287 h1; Top Overlay "3" at 78.123,4.287 h1; Top Overlay "4" at 81.933,4.287 h1; Top Overlay "5" at 85.743,4.287 h1
J11: Top Overlay "2" at 97.43,6.269 h1; Top Overlay "1" at 92.43,6.269 h1
J12: Top Overlay "2" at 110.13,6.269 h1; Top Overlay "1" at 105.13,6.269 h1
J13: Top Overlay "2" at 122.83,6.269 h1; Top Overlay "1" at 117.83,6.269 h1
J14: Top Overlay "2" at 135.53,6.269 h1; Top Overlay "1" at 130.53,6.269 h1
J15: Top Overlay "1" at 115.14,69.976 h1 r270; Mechanical 14 "1" at 115.14,69.976 h1 r270